# EAGLE board eeZee microSD (EAGLE 6.3)
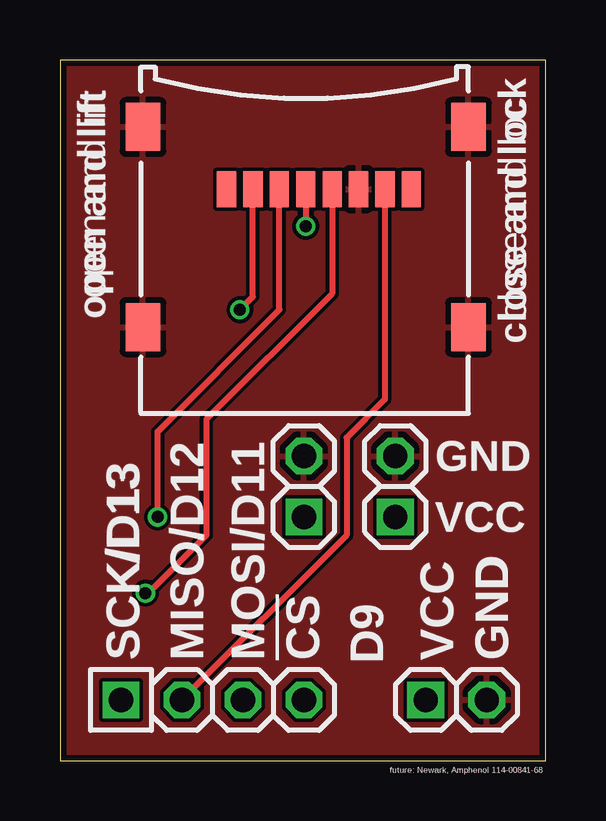
[diagram p0: board, top side]
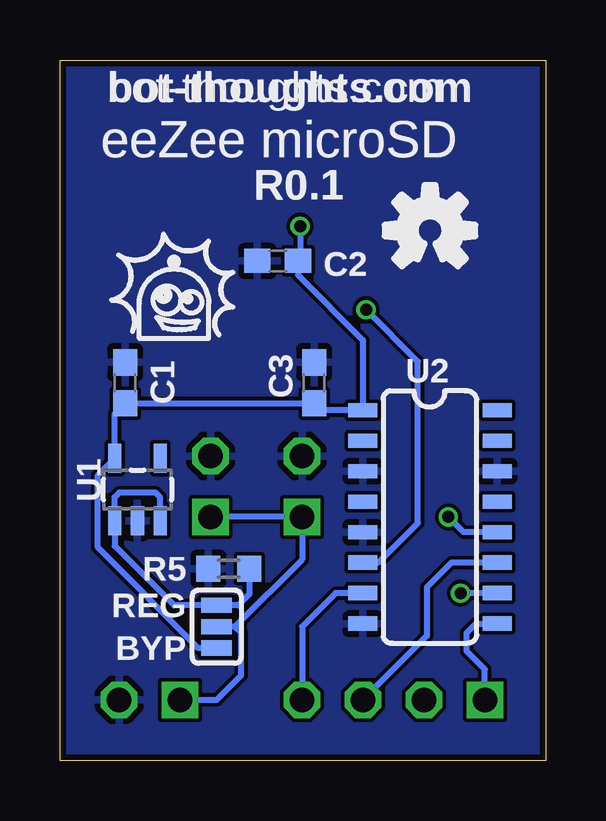
[diagram p1: board, bottom side, seen from below]

Size 20.24 x 29.2 mm. Coordinates in mm from the lower left corner, seen from the top.
Outline: 0,0 20.24,0 20.24,29.2 0,29.2 0,0
Copper layers (1*16): Top 0.035mm / dielectric 1.5mm / Bottom 0.035mm
Design rules "ITEADstudio_DRC": minimum track width 6mil, minimum drill 12mil, track to track 6mil, track to pad 6mil, pad to pad 6mil, via to via 6mil, smd to smd 0mil, copper to edge 10mil, drill to drill 10mil, minimum pad ring 10mil, minimum via ring 6mil, stop-mask expansion 2mil, vias tented up to drill 100mil, thermal gap 10mil

## Footprints (pad centres in the part's own frame; a part is rotated, then mirrored left to right if it is on the bottom)
C0603 = smd 1.1 x 1: 1 -0.85,0; 2 0.85,0
1X02-S = drill 1.016 square: 1 -1.27,0 | drill 1.016 octagon: 2 1.27,0
1X04-S = drill 1.016 square: 1 -3.81,0 | drill 1.016 octagon: 2 -1.27,0; 3 1.27,0; 4 3.81,0
R0603 = smd 1 x 1.1: 1 -0.85,0; 2 0.85,0
SJ_3 = smd 0.635 x 1.27: 1 -0.889,0; 2 0,0; 3 0.889,0
SOT23-5 = smd 0.55 x 1.2: 1 -0.95,-1.3; 2 0,-1.3; 3 0.95,-1.3; 4 0.95,1.3; 5 -0.95,1.3
SO016 = smd 0.6 x 1.2: 1 -4.445,-2.8; 2 -3.175,-2.8; 3 -1.905,-2.8; 4 -0.635,-2.8; 5 0.635,-2.8; 6 1.905,-2.8; 7 3.175,-2.8; 8 4.445,-2.8; 9 4.445,2.8; 10 3.175,2.8; 11 1.905,2.8; 12 0.635,2.8; 13 -0.635,2.8; 14 -1.905,2.8; 15 -3.175,2.8; 16 -4.445,2.8
TFLASH_CP-0000-086 = smd 0.8 x 1.5: CS 8.98,2.6; DI 7.88,2.6; DO 3.48,2.6; GND 4.58,2.6; NC 10.08,2.6; RSV 2.38,2.6; SCLK 5.68,2.6; VDD 6.78,2.6 | smd 1.45 x 2: SHIELD1 0,8.35; SHIELD2 13.56,8.35; SHIELD3 13.56,0; SHIELD4 0,0

## Placement (x,y rotation side)
C1  1uF  [C0603]  17.53,15.75 90 bottom
C2  0.1uF  [C0603]  11.18,20.83 180 bottom
C3  0.1uF  [C0603]  9.65,15.75 90 bottom
JP1  [1X02-S]  16.51,2.54 0 top
JP2  [1X02-S]  10.16,11.43 90 top
JP3  [1X02-S]  13.97,11.43 90 top
JP5  [1X04-S]  6.35,2.54 0 top
R5  10K  [R0603]  13.21,8 0 bottom
REG  BYP  [SJ_3]  13.72,5.59 90 bottom
U1  MCP1824S  [SOT23-5]  17.02,11.3 0 bottom
U2  74HC4050  [SO016]  4.83,10.16 270 bottom
U$1  MICROSD_TFLASH  [TFLASH_CP-0000-086]  17.02,26.42 180 top

## Library data of the parts
C1 = rcl; PARTNO: LMK107B7105KA-T
C2 C3 = rcl; DATABASE: ./../../../eagle/PARTSDB.TXT; PARTNO: LMK107B7105KA-T
JP1 JP5 = pinhead-2
JP2 JP3 = pinhead-2; DATABASE: ./../../../eagle/PARTSDB.TXT
R5 = rcl; DATABASE: ./../PARTSDB.TXT; PARTNO: ERJ-3GEYJ103V
REG U2 = SparkFun
U1 = mes_regulators; IOUT: 300mA; PARTNO: MCP1824ST-3302E/DB
U$1 = mes_electromech

## Nets
!CS_HV: JP5.4 U2.7
!SS: U2.6 U$1.CS
GND: C1.2 C2.2 C3.2 JP1.2 JP2.2 JP3.2 R5.1 U1.2 U2.3 U2.5 U2.8 U2.14 U$1.GND U$1.SHIELD1 U$1.SHIELD2 U$1.SHIELD3 U$1.SHIELD4
MISO: JP5.2 U$1.DO
MOSI: U2.12 U$1.DI
MOSI_HV: JP5.3 U2.11
SCK: U2.10 U$1.SCLK
SCK_HV: JP5.1 U2.9
VCC: JP1.1 JP2.1 JP3.1 REG.2
VIN: R5.2 REG.3 U1.1 U1.3
VOUT: C1.1 C2.1 C3.1 REG.1 U1.5 U2.1 U$1.VDD

## Tracks (layer width: path | path; a pad name or v marks a point on that pad's centre or on a via)
!CS_HV
  Bottom 0.254: U2.7 8.76,6.99 10.16,5.59 JP5.4
!SS  (via drill 0.5)
  Top 0.254: v7.49,18.8 8.04,19.34 U$1.CS
  Bottom 0.254: U2.6 6.99,8.26 5.33,9.91 5.33,16.64 v7.49,18.8
GND
  pour Bottom: 20.32,29.21 20.32,0 0,0 0,29.21
  pour Top: 20.32,29.21 20.32,0 0,0 0,29.21
MISO
  Top 0.254: U$1.DO 13.54,15.06 11.94,13.46 11.94,9.4 JP5.2
MOSI  (via drill 0.5)
  Top 0.254: v4.06,10.16 4.06,13.72 9.14,18.8 U$1.DI
  Bottom 0.254: v4.06,10.16 3.43,9.53 U2.12
MOSI_HV
  Bottom 0.254: JP5.3 4.95,5.21 4.95,7.24 3.94,8.26 U2.11
SCK  (via drill 0.5)
  Top 0.254: v3.56,6.99 3.68,6.99 6.1,9.4 6.1,14.22 11.34,19.47 U$1.SCLK
  Bottom 0.254: U2.10 v3.56,6.99
SCK_HV
  Bottom 0.254: JP5.1 2.54,3.81 3.3,4.57 3.3,5.33 2.92,5.71 U2.9
VCC
  Bottom 0.254: JP1.1 13.72,2.54 12.7,3.56 12.7,5.33 12.95,5.59 | 12.95,5.59 REG.2 | 12.95,5.59 10.16,8.38 JP2.1 JP3.1
VIN
  Bottom 0.254: R5.2 12.36,6.95 12.83,6.48 REG.3 15.49,6.48 17.97,8.95 U1.1 17.97,10.99 17.78,11.18 16.26,11.18 16.07,10.99 U1.3
VOUT  (via drill 0.5)
  Top 0.254: U$1.VDD v10.24,22.27
  Bottom 0.254: REG.1 14.48,4.7 18.67,8.89 18.67,11.9 U1.5 17.97,14.46 C1.1 C3.1 9.37,14.61 U2.1 | v10.24,22.27 10.24,20.92 C2.1 10.33,20.23 7.62,17.53 U2.1 | U2.1

## Text on the board
tPlace: open and lift | close and lock | GND | VCC | SCK/D13 | MISO/D12 | MOSI/D11 | !CS | VCC | GND | future: Newark, Amphenol 114-00841-68
tNames: D9
bNames: bot-thoughts.com | eeZee microSD | R0.1
_tsilk: open and lift | close and lock | GND | VCC | SCK/D13 | MISO/D12 | MOSI/D11 | !CS | D9 | VCC | GND
_bsilk: bot-thoughts.com | eeZee microSD | R0.1 | C2 | C1 | U2 | C3 | U1 | R5 | REG | BYP